# Altium PCB 28Pins_Project_V1I1_PCB.PcbDoc (part 1 of 3)
Units mm, origin at the board's own origin, x right, y up, seen from the top; angles counter-clockwise.
Board outline 68.58 x 53.34 mm, 2 copper layers (L1, L2), stack 1.671 mm thick; 106 components, 71 nets, 323 pads, 106 vias.
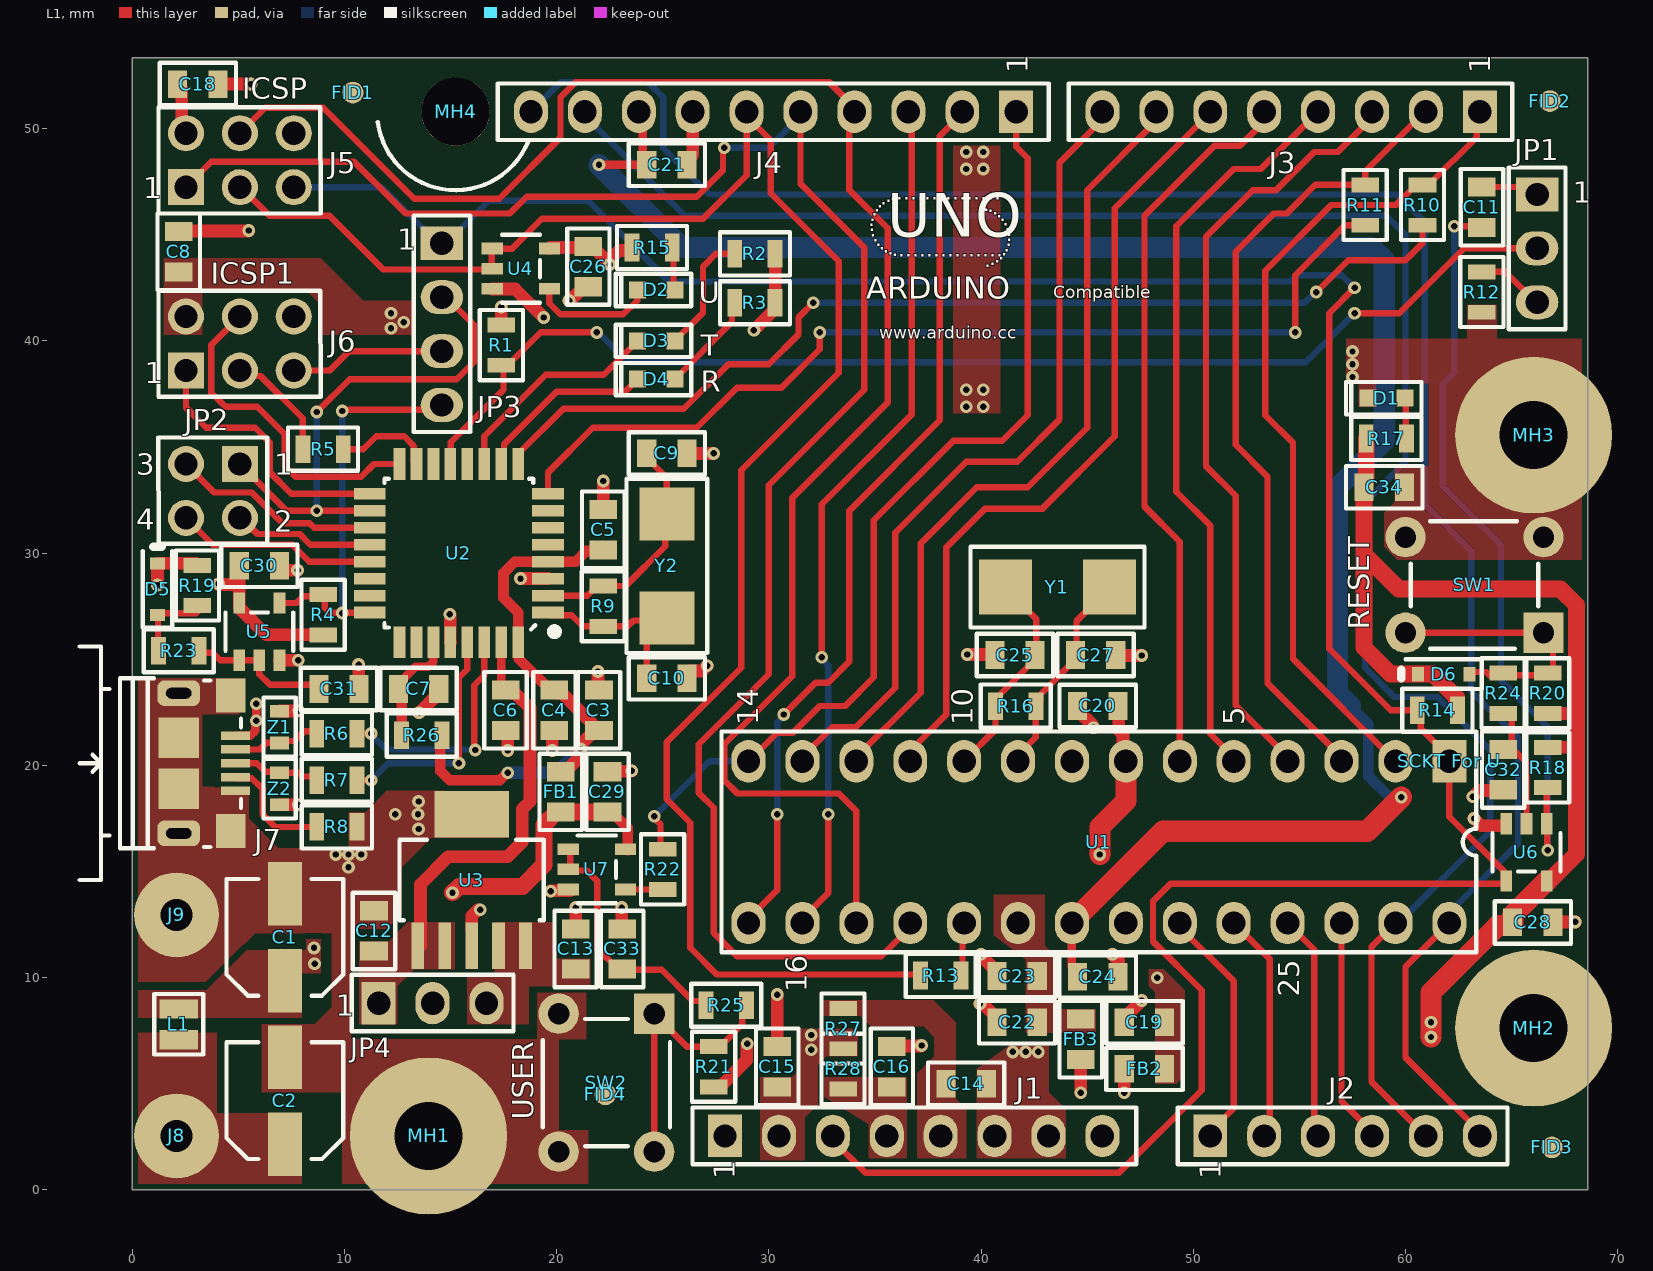
[diagram p0: L1 view]
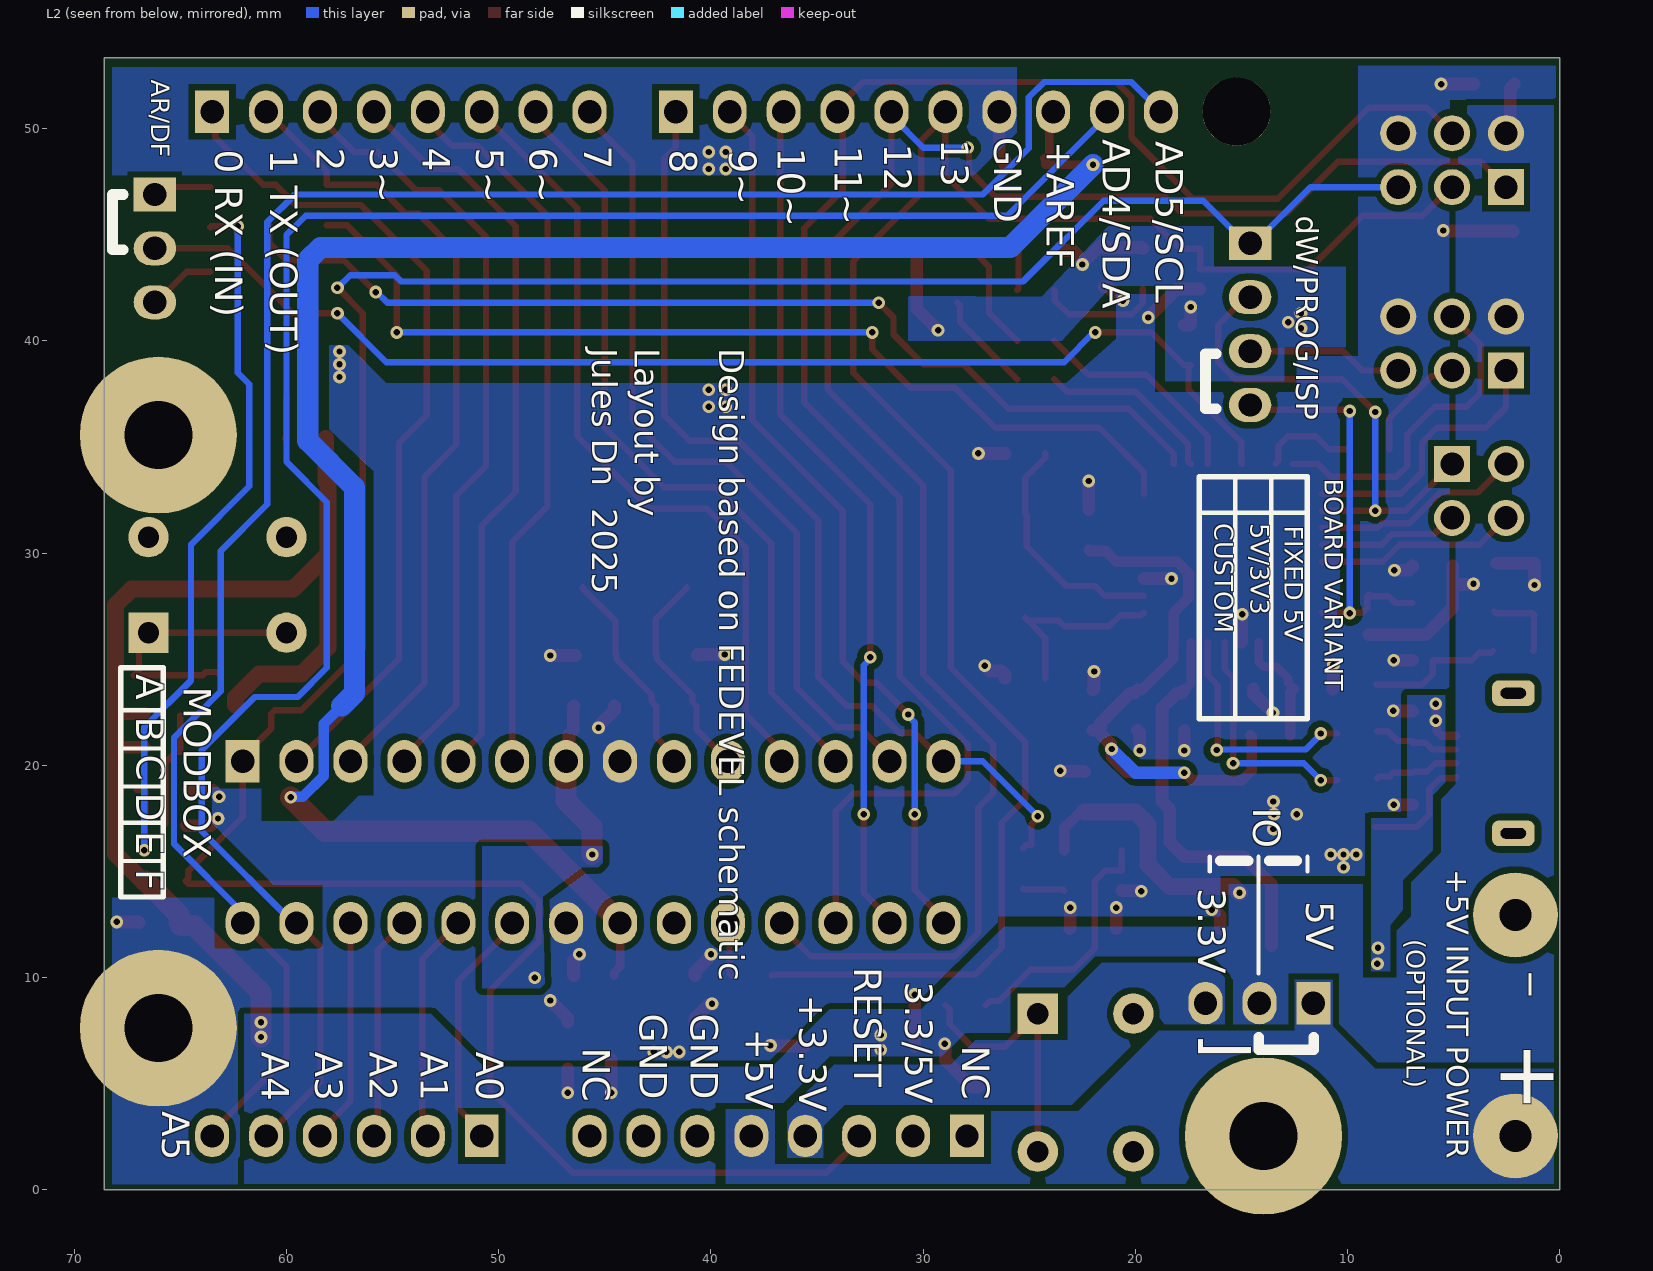
[diagram p1: L2 view, seen from below]

## Layer stack, top to bottom
Top Solder: solder mask 0.0102, Solder Resist, Dk 3.5
L1: signal copper 0.0356
Dielectric 1: dielectric 1.6, FR-4, Dk 4.8
L2: signal copper 0.0356
Bottom Solder: solder mask 0.0102, Solder Resist, Dk 3.5

## Board outline
0,0 68.58,0 68.58,53.34 0,53.34

## Design rules (kind name [scope] priority, off if disabled: settings)
Clearance "Around Polygons" [IsRegion] p1: gap=0.3 ignorepadtopadclearanceinfootprint=FALSE
Clearance [All] p2: gap=0.2 ignorepadtopadclearanceinfootprint=FALSE
ComponentClearance "SW2 and FID4" [InComponent('SW2') vs InComponent('FID4')] p1: gap=0 collisioncheckmode=3 verticalgap=0 showdistances=FALSE
ComponentClearance "Power Resistors" [InComponent('R27') vs InComponent('R28')] p2: gap=0 collisioncheckmode=3 verticalgap=0 showdistances=FALSE
ComponentClearance "MH4 to FID1 and J4" [InComponent('MH4') vs InComponent('FID1')OR InComponent('J4')] p3: gap=0 collisioncheckmode=3 verticalgap=0 showdistances=FALSE
ComponentClearance "DIPSOCKET to MH2 and U1" [InComponent('SCKT For U') vs InComponent('MH2') Or InComponent('U1')] p4: gap=0 collisioncheckmode=3 verticalgap=0 showdistances=FALSE
ComponentClearance "MH2 to J2" [InComponent('MH2') vs InComponent('J2')] p5: gap=0 collisioncheckmode=3 verticalgap=0 showdistances=FALSE
ComponentClearance [All] p6: gap=0.2 collisioncheckmode=3 verticalgap=0.2 showdistances=FALSE
HoleSize [All] p1: absolutevalues=TRUE maxlimit=10 minlimit=0.2 maxpercent=80.000 minpercent=20.000
HoleToHoleClearance [All] p1: gap=0.3 allowstackedmicrovias=TRUE
MinimumSolderMaskSliver [All] p1: minsoldermaskwidth=0.1
PolygonConnect [All] p1: connectstyle=Direct reliefconductorwidth=0.254 reliefentries=4 polygonreliefangle="90 Angle" airgapwidth=0.254
RoutingVias [All] p1: holewidth=0.3 width=0.6 viastyle="Through Hole" minholewidth=0.3 minwidth=0.6 maxholewidth=0.3 maxwidth=0.6
SilkToSilkClearance [All] p1: silktosilkclearance=0.1
SilkToSolderMaskClearance [IsPad] p1: minsilkscreentomaskgap=0.1 clearancetoexposedcopper=TRUE
SolderMaskExpansion [All] p1: expansion=0.1 istentingtop=FALSE
UnRoutedNet [All] p1: checkbadconnections=TRUE
Width "Width POWERS" [InNet('+*') Or InNet('GND')] p1: maxlimit=4 minlimit=0.4 preferedwidth=0.4
Width [All] p2: maxlimit=0.5 minlimit=0.2 preferedwidth=0.3
23 further rules are at their usual default settings.

## Components (designator, comment, footprint, x,y, rotation, side; value= is the part's Value field where it differs from the comment)
C1 "100u / 10V" C_ALU_C_SIZE 7.2,11.9 r90 top value=100uF
C2 "100u / 10V" C_ALU_C_SIZE 7.2,4.2 r90 top value=100uF
C3 "10uF / 16V" "C0805 - 1.45HEIGHT" 22,22.6 r270 top
C4 "100n" C0805 19.9,22.6 r90 top value=100nF
C5 "100n" C0805 22.2,31.1 r270 top value=100nF
C6 "100n" C0805 17.6,22.6 r90 top value=100nF
C7 "1uF / 25V" C0805 13.5,23.6 r180 top
C8 "100n" C0805 2.2,44.2 r270 top value=100nF
C9 "18p" "C0805 - 1.45HEIGHT" 25.2,34.7 r180 top value=18pF
C10 "18p" "C0805 - 1.45HEIGHT" 25.2,24.1 r0 top value=18pF
C11 "100n" C0805 63.6,46.3 r90 top value=100nF
C12 "10uF / 16V" "C0805 - 1.45HEIGHT" 11.4,12.2 r270 top
C13 "10uF / 16V" "C0805 - 1.45HEIGHT" 20.9,11.35 r270 top
C14 "100n" C0805 39.3,5 r180 top value=100nF
C15 "100n" C0805 30.4,5.8 r270 top value=100nF
C16 "100n" C0805 35.8,5.8 r270 top value=100nF
C18 "100n" C0805 3.1,52.1 r180 top value=100nF
C19 "10uF / 16V" "C0805 - 1.45HEIGHT" 47.7,7.9 r0 top
C20 "100n" C0805 45.5,22.8 r0 top value=100nF
C21 "10uF / 16V" "C0805 - 1.45HEIGHT" 25.2,48.3 r180 top
C22 "10uF / 16V" "C0805 - 1.45HEIGHT" 41.7,7.9 r0 top
C23 "100n" C0805 41.7,10.075 r0 top value=100nF
C24 "100n" C0805 45.5,10.05 r180 top value=100nF
C25 "18p" "C0805 - 1.45HEIGHT" 41.6,25.2 r0 top value=18pF
C26 "100n" C0805 21.5,43.5 r90 top value=100nF
C27 "18p" "C0805 - 1.45HEIGHT" 45.4,25.2 r0 top value=18pF
C28 "100n" C0805 66,12.6 r180 top value=100nF
C29 "100n" C0805 22.4,18.75 r270 top value=100nF
C30 "100n" C0805 6,29.4 r180 top value=100nF
C31 "100n" C0805 9.75,23.6 r180 top value=100nF
C32 "100n" C0805 64.6,19.8 r90 top value=100nF
C33 "100n" C0805 23.1,11.35 r270 top value=100nF
C34 "10uF / 16V" "C0805 - 1.45HEIGHT" 59,33.1 r180 top
D1 "Green" LED_0603 59.1,37.3 r0 top
D2 "Orange" LED_0603 24.7,42.4 r0 top
D3 "Orange" LED_0603 24.7,40 r0 top
D4 "Orange" LED_0603 24.7,38.2 r0 top
D5 "BAT54HT1G" SOD323 1.2,28.3 r270 top value=10pF
D6 "BAT54HT1G" SOD323 61.8,24.3 r0 top value=10pF
FB1 "MPZ2012S601AT000" C0805 20.2,18.75 r90 top
FB2 "MPZ2012S601AT000" C0805 47.7,5.7 r0 top
FB3 "MPZ2012S601AT000" C0805 44.7,7.1 r90 top
FID1 "FID_1MMC" FID_40x120D 10.4,51.7 r0 top
FID2 "FID_1MMC" FID_40x120D 66.8,51.3 r90 top
FID3 "FID_1MMC" FID_40x120D 66.9,2 r90 top
FID4 "FID_1MMC" FID_40x120D 22.3,4.5 r90 top
J1 "HDR FEMALE 1x8 2.54mm" Hdr_Female_1x8_2.54mm 27.94,2.54 r90 top locked
J2 "HDR FEMALE 1x6 2.54mm" Hdr_Female_1x6_2.54mm 50.8,2.54 r90 top locked
J3 "HDR FEMALE 1x8 2.54mm" Hdr_Female_1x8_2.54mm 63.5,50.8 r270 top locked
J4 "HDR FEMALE 1x10 2.54mm" Hdr_Female_1x10_2.54mm 41.656,50.8 r270 top locked
J5 "HDR 2x3" HDR_2X3_2.54mm 2.54,47.244 r90 top locked
J6 "HDR 2x3" HDR_2X3_2.54mm 2.54,38.608 r90 top locked
J7 "10118193-0001LF" 10118193 3.537,20.1 r270 top locked
J8 "4MMx1.5MM" PAD_WITH_HOLE_4mmx1.5mm#1 2.1,2.6 r0 top
J9 "4MMx1.5MM" PAD_WITH_HOLE_4mmx1.5mm#2 2.1,12.954 r0 top
JP1 "HDR 1x3" Hdr_1x3_2.54mm 66.2,46.9 r0 top locked
JP2 "HDR 2x2" HDR_2X2_2.54MM 5.08,34.2 r270 top locked
JP3 "HDR 1x4" HDR_1x4_2.54mm 14.6,44.6 r0 top locked
JP4 "HDR 1x3" Hdr_1x3_2.54mm 11.62,8.8 r90 top locked
L1 "2U2 / 2A" 2016_IND 2.2,7.8 r270 top value=2.2uH
MH1 "MH_7.4MMC_3.2MMD" MH_7.4MMD_3.2MMD 13.97,2.54 r0 top locked
MH2 "MH_7.4MMC_3.2MMD" MH_7.4MMD_3.2MMD 66.04,7.62 r0 top locked
MH3 "MH_7.4MMC_3.2MMD" MH_7.4MMD_3.2MMD 66.04,35.56 r0 top locked
MH4 "MH_7.4MMNC_3.2MMD" MH_7.4MMD_3.2MMD_NON_COPPER_NPTH 15.24,50.8 r0 top locked
R1 "100K" R0805 17.4,39.8 r90 top value=100kR
R2 "560R" R0805 29.35,44.1 r0 top
R3 "560R" R0805 29.35,41.8 r0 top
R4 "10k" R0805 9,27.1 r270 top value=10kR
R5 "22R" R0805 9,34.9 r180 top
R6 "22R" R0805 9.65,21.5 r0 top
R7 "22R" R0805 9.65,19.3 r0 top
R8 "0R" R0805 9.65,17.1 r0 top value=0mR
R9 "1M" R0805 22.2,27.5 r90 top value=1MR
R10 "1K" R0805 60.8,46.4 r90 top value=1kR
R11 "1K" R0805 58.1,46.4 r90 top value=1kR
R12 "1K" R0805 63.6,42.3 r90 top value=1kR
R13 "22R" R0805 38.1,10.1 r180 top
R14 "10k" R0805 61.5,22.6 r0 top value=10kR
R15 "560R" R0805 24.5,44.4 r180 top
R16 "1M" R0805 41.634,22.792 r180 top value=1MR
R17 "560R" R0805 59.1,35.4 r180 top
R18 "10k" R0805 66.7,19.9 r90 top value=10kR
R19 "10k" R0805 3.075,28.475 r90 top value=10kR
R20 "10k" R0805 66.7,23.4 r270 top value=10kR
R21 "10k" R0805 27.4,5.8 r270 top value=10kR
R22 "560R" R0805 25,15.1 r90 top
R23 "22R" R0805 2.2,25.4 r0 top
R24 "22R" R0805 64.6,23.4 r270 top
R25 "22R" R0805 28,8.7 r180 top
R26 "0R" R0805 13.65,21.425 r0 top value=0mR
R27 "0R" R0805 33.5,7.6 r270 top value=0mR
R28 "0R" R0805 33.5,5.7 r270 top value=0mR
"SCKT For U" "28-DIP Socket" 28-DIP_7.62MM_SOCKET 62.065,20.193 r270 top locked
SW1 "1825910-6" 1825910-6 63.25,28.5 r270 top
SW2 "1825910-6" 1825910-6 22.35,5.05 r0 top
U1 "ATMEGA328P-PU" 28_DIP_7.62MM 62.065,20.193 r270 top locked
U2 "ATMEGA16U2-AU-ND" TQFP32 15.4,30 r180 top
U3 "TL1963A-33DCQR" "GCQ (R-PDSO-G6)" 16,14.6 r90 top
U4 "SN74AHC1G09DBVR" DBV_SOT_23_5 18.325,43.4 r0 top
U5 "SN74AHC1G09DBVR" DBV_SOT_23_5 6,26.3 r90 top
U6 "SN74AHC1G09DBVR" DBV_SOT_23_5 65.7,15.9 r270 top
U7 "SN74AHC1G09DBVR" DBV_SOT_23_5 21.9,15.1 r0 top
Y1 "ABM7-16.000MHZ-D2Y-T" ABM7_v1_1_big 43.6,28.4 r180 top
Y2 "ABM7-16.000MHZ-D2Y-T" ABM7_v1_1_big 25.2,29.4 r90 top
Z1 "CG0603MLC-05E" R0603 6.95,21.8 r270 top value=0.5pF
Z2 "CG0603MLC-05E" R0603 6.95,18.9 r90 top value=0.5pF

## Footprints (in the part's own frame and the unit in brackets; to place one, negate y for a bottom-side part, rotate by r counter-clockwise, add the part's x,y. Pads: shape width x height; smd on the part's side, far side on the other; paste and mask are expansions set on the pad)
28-DIP_7.62MM_SOCKET [mm]
  body extent -1.24,-34.26 8.86,1.24, height 4.2
28_DIP_7.62MM [mm]
  rect 2x1.6 hole 1.1: 1(0,0)
  oval 2x1.6 hole 1.1: 2(0,-2.54) 3(0,-5.08) 4(0,-7.62) 5(0,-10.16) 6(0,-12.7) 7(0,-15.24) 8(0,-17.78) 9(0,-20.32) 10(0,-22.86) 11(0,-25.4) 12(0,-27.94) 13(0,-30.48) 14(0,-33.02) 15(7.62,-33.02) 16(7.62,-30.48) 17(7.62,-27.94) 18(7.62,-25.4) 19(7.62,-22.86) 20(7.62,-20.32) 21(7.62,-17.78) 22(7.62,-15.24) 23(7.62,-12.7) 24(7.62,-10.16) 25(7.62,-7.62) 26(7.62,-5.08) 27(7.62,-2.54) 28(7.62,0)
  silkscreen extent -1.4,-34.29 9,1.27, body extent -0.03,-34.51 7.85,1.43, height 7.55
2016_IND [mm]
  rect 0.9x1.8 smd: 1(-0.725,0) 2(0.725,0)
  silkscreen extent -1.43,-1.15 1.43,1.15, body extent -1,-0.75 1,0.75, height 1
1825910-6 [mm]
  rect 1.9x1.9 hole 1: 1(2.25,3.25)
  round 1.9 hole 1: 2(2.25,-3.25) 3(-2.25,3.25) 4(-2.25,-3.25)
  silkscreen extent -3,-3 3,3, body extent -3,-3.9 3,3.9, height 5
10118193 [mm]
  rect 0.4x1.35 smd mask+0.05: 1(-1.3,1.338) 2(-0.65,1.338) 3(0,1.338) 4(0.65,1.338) 5(1.3,1.338)
  rect 1.6x1.4 smd: 6(-3.2,1.112) 7(3.2,1.112)
  rrect50% 1.2x2 hole 0.5 slot 1.2 at 90 deg: 8(-3.3,-1.338) 9(3.3,-1.338)
  rect 1.9x1.9 smd: 10(-1.2,-1.338) 11(1.2,-1.338)
  silkscreen extent -5.5,-6 5.5,1.6, body extent -3.93,-4.07 3.93,1.59, height 2.87
ABM7_v1_1_big [mm]
  rect 2.5x2.6 smd: 1(-2.45,0) 2(2.45,0)
  silkscreen extent -4.1,-1.9 4.1,1.9, body extent -3,-1.75 3,1.75, height 1.41
C0805 [mm]
  rect 0.9x1.3 smd: 1(-0.95,0) 2(0.95,0)
  silkscreen extent -1.8,-1 1.8,1, body extent -1,-0.6 1,0.6
"C0805 - 1.45HEIGHT" [mm]
  rect 0.9x1.3 smd: 1(-0.95,0) 2(0.95,0)
  silkscreen extent -1.8,-1 1.8,1, body extent -1,-0.6 1,0.6
C_ALU_C_SIZE [mm]
  rect 3x1.6 smd: 1(-2.05,0) 2(2.05,0)
  silkscreen extent -2.75,-2.75 2.75,2.75, body extent -2.95,-2.65 2.95,2.65, height 5.41
DBV_SOT_23_5 [mm]
  rect 1x0.55 smd: 1(-1.35,0.95) 2(-1.35,0) 3(-1.35,-0.95) 4(1.35,-0.95) 5(1.35,0.95)
  silkscreen extent -0.9,-1.6 0.9,1.6, body extent -1.51,-1.53 1.51,1.53, height 1.61
FID_40x120D [mil]
  round 40 smd paste-40 mask+40: 1(0,0)
"GCQ (R-PDSO-G6)" [mm]
  rect 2.2x0.6 smd: 1(-3.1,2.54) 2(-3.1,1.27) 3(-3.1,0) 4(-3.1,-1.27) 5(-3.1,-2.54)
  rect 2.2x3.5 smd: 6(3.1,0)
  silkscreen extent -1.9,-3.4 1.9,3.4, body extent -3.63,-3.27 3.63,3.27, height 1.79
Hdr_1x3_2.54mm [mm]
  rect 2x1.6 hole 1.1: 1(0,0)
  oval 2x1.6 hole 1.1: 2(0,-2.54) 3(0,-5.08)
  silkscreen extent -1.33,-6.35 1.34,1.27, body extent -1.21,-6.15 1.2,1.07, height 8.39
HDR_1x4_2.54mm [mm]
  rect 2x1.6 hole 1.1: 1(0,0)
  oval 2x1.6 hole 1.1: 2(0,-2.54) 3(0,-5.08) 4(0,-7.62)
  silkscreen extent -1.33,-8.89 1.34,1.3, body extent -1.21,-8.69 1.2,1.07, height 8.39
HDR_2X2_2.54MM [mm]
  rect 1.7x1.7 hole 1.1: 1(0,0)
  round 1.7 hole 1.1: 2(2.54,0) 3(0,-2.54) 4(2.54,-2.54)
  silkscreen extent -1.24,-3.84 3.76,1.3, body extent -1.24,-3.81 3.76,1.27, height 8.01
HDR_2X3_2.54mm [mm]
  rect 1.7x1.7 hole 1.1: 1(0,0)
  round 1.7 hole 1.1: 2(2.54,0) 3(0,-2.54) 4(2.54,-2.54) 5(0,-5.08) 6(2.54,-5.08)
  silkscreen extent -1.24,-6.35 3.76,1.3, body extent -1.23,-6.35 3.77,1.27, height 8.01
Hdr_Female_1x6_2.54mm [mm]
  rect 2x1.6 hole 1.1: 1(0,0)
  oval 2x1.6 hole 1.1: 2(0,-2.54) 3(0,-5.08) 4(0,-7.62) 5(0,-10.16) 6(0,-12.7)
  silkscreen extent -1.33,-14 1.34,1.53, body extent -1.25,-14.17 1.25,1.47, height 8.31
Hdr_Female_1x8_2.54mm [mm]
  rect 2x1.6 hole 1.1: 1(0,0)
  oval 2x1.6 hole 1.1: 2(0,-2.54) 3(0,-5.08) 4(0,-7.62) 5(0,-10.16) 6(0,-12.7) 7(0,-15.24) 8(0,-17.78)
  silkscreen extent -1.33,-19.37 1.34,1.53, body extent -1.26,-19.28 1.24,1.44, height 8.31
Hdr_Female_1x10_2.54mm [mm]
  rect 2x1.6 hole 1.1: 1(0,0)
  oval 2x1.6 hole 1.1: 2(0,-2.54) 3(0,-5.08) 4(0,-7.62) 5(0,-10.16) 6(0,-12.7) 7(0,-15.24) 8(0,-17.78) 9(0,-20.32) 10(0,-22.86)
  silkscreen extent -1.33,-24.43 1.34,1.53, body extent -1.25,-24.33 1.25,1.47, height 8.31
LED_0603 [mm]
  rect 0.8x0.8 smd: 1(-0.875,0) 2(0.875,0)
  silkscreen extent -1.91,-0.76 1.65,0.76, body extent -0.85,-0.4 0.85,0.4, height 0.66
MH_7.4MMD_3.2MMD [mm]
  round 7.4 hole 3.2: 1(0,0)
MH_7.4MMD_3.2MMD_NON_COPPER_NPTH [mm]
  round 3.2 hole 3.2 unplated: 1(0,0)
  silkscreen extent -3.67,-3.7 3.43,-0.49
PAD_WITH_HOLE_4mmx1.5mm#1 [mm]
  round 4 hole 1.5: 1(0,-0.06)
PAD_WITH_HOLE_4mmx1.5mm#2 [mm]
  round 4 hole 1.5: 1(0,0)
R0603 [mm]
  rect 0.6x0.9 smd: 1(-0.75,0) 2(0.75,0)
  silkscreen extent -1.4,-0.76 1.4,0.76, body extent -0.8,-0.4 0.8,0.4, height 0.85
R0805 [mm]
  rect 0.7x1.3 smd: 1(-0.95,0) 2(0.95,0)
  silkscreen extent -1.65,-1.02 1.65,1.02, body extent -1,-0.6 1,0.6, height 0.71
SOD323 [mil]
  rect 22x27 smd: 1(-48,0) 2(48,0)
  silkscreen extent -79,-28 71,28, body extent -49,-25 49,25, height 39
TQFP32 [mm]
  rect 1.5x0.55 smd mask+0.06: 1(-4.2,2.8) 2(-4.2,2) 3(-4.2,1.2) 4(-4.2,0.4) 5(-4.2,-0.4) 6(-4.2,-1.2) 7(-4.2,-2) 8(-4.2,-2.8) 17(4.2,-2.8) 18(4.2,-2) 19(4.2,-1.2) 20(4.2,-0.4) 21(4.2,0.4) 22(4.2,1.2) 23(4.2,2) 24(4.2,2.8)
  rect 0.55x1.5 smd mask+0.06: 9(-2.8,-4.2) 10(-2,-4.2) 11(-1.2,-4.2) 12(-0.4,-4.2) 13(0.4,-4.2) 14(1.2,-4.2) 15(2,-4.2) 16(2.8,-4.2) 25(2.8,4.2) 26(2,4.2) 27(1.2,4.2) 28(0.4,4.2) 29(-0.4,4.2) 30(-1.2,4.2) 31(-2,4.2) 32(-2.8,4.2)
  silkscreen extent -4.6,-3.5 3.5,3.8, body extent -4.62,-4.62 4.62,4.62, height 1.2

## Part data
C1 C2: library part EEE-1AA101WR, "Aluminum Electrolytic Capacitor, 100 uF, 10 V, ± 20%, 1000 hours @ 85°C, Radial Can - SMD", Case/Package=Radial, Leakage Current=10uA, Manufacturer=Panasonic, Max Operating Temperature=85°C, Min Operating Temperature=-40°C, Package Quantity=1000, Ratings=AEC-Q200, Ripple Current=50mA, Supplier Part Number=PCE3867CT-ND, Tolerance=20%, Voltage Rating=10V, Category="Aluminum Electrolytic Capacitors", ComponentLink1Description=https://datasheet.ciiva.com/26945/getdatasheetpartid-169213-26945071.pdf?src-supplier=Verical, ComponentLink1URL=https://datasheet.ciiva.com/26945/getdatasheetpartid-169213-26945071.pdf?src-supplier=Verical, ComponentLink2Description=https://datasheet.ciiva.com/24027/aba0000ce2-40801-24027541.pdf?src-supplier=Mouser, ComponentLink2URL=https://datasheet.ciiva.com/24027/aba0000ce2-40801-24027541.pdf?src-supplier=Mouser, ComponentLink3Description=https://datasheet.ciiva.com/14598/70255710-14598233.pdf?src-supplier=Allied+Electronics, ComponentLink3URL=https://datasheet.ciiva.com/14598/70255710-14598233.pdf?src-supplier=Allied+Electronics, ComponentLink4Description=https://datasheet.ciiva.com/14605/70255710-14605689.pdf?src-supplier=Allied+Electronics, ComponentLink4URL=https://datasheet.ciiva.com/14605/70255710-14605689.pdf?src-supplier=Allied+Electronics, ComponentLink5Description=https://datasheet.ciiva.com/11673/aba0000ce2-11673882.pdf?src-supplier=Avnet, ComponentLink5URL=https://datasheet.ciiva.com/11673/aba0000ce2-11673882.pdf?src-supplier=Avnet, ComponentLink6Description=https://datasheet.ciiva.com/16427/aba0000ce2-16427544.pdf?src-supplier=Future+Electronics, ComponentLink6URL=https://datasheet.ciiva.com/16427/aba0000ce2-16427544.pdf?src-supplier=Future+Electronics, Construction=Cylindrical, Diameter=5mm, Dissipation Factor=30%, Height=5.4mm, Lead Free="Lead Free", Length=5.5mm, Life (Hours)=1000Hour, Manufacturer Part Number=EEE-1AA101WR, Mounting Technology="Surface Mount,PCB", Packaging="Tape and Reel", Pricing="1=0.36, 10=0.22, 50=0.1606, 100=0.1419, 500=0.10952 (USD)", Radiation Hardening=No, Reach SVHC Compliant=Unknown, Ripple Current (AC)=50mA, RoHS=Yes, RoHS Compliant=Yes, Series=S, Stock=38374, Supplier=Digikey, Termination=SMD/SMT, Voltage Rating (DC)=10V
C3 C12 C13 C19 C21 C22 C34: library part CGA4J1X5R1C106M125AC, "Multilayer Ceramic Capacitor, 10 uF, 16 V, ± 20%, X5R, 0805 [2012 Metric]", Manufacturer=TDK, Supplier Part Number=445-12654-1-ND, Category="Ceramic Capacitors", ComponentLink1Description=http://product.tdk.com/en/catalog/datasheets/mlcc_automotive_general_en.pdf?src-supplier=Avnet, ComponentLink1URL=http://product.tdk.com/en/catalog/datasheets/mlcc_automotive_general_en.pdf?src-supplier=Avnet, ComponentLink2Description=http://product.tdk.com/capacitor/mlcc/detailed_information.php?lang=en&ref=jp&part_no=CGA4J1X5R1C106M125AC&src-supplier=Mouser, ComponentLink2URL=http://product.tdk.com/capacitor/mlcc/detailed_information.php?lang=en&ref=jp&part_no=CGA4J1X5R1C106M125AC&src-supplier=Mouser, ComponentLink3Description=https://product.tdk.com/info/en/catalog/datasheets/mlcc_automotive_general_en.pdf?src-supplier=Digikey, ComponentLink3URL=https://product.tdk.com/info/en/catalog/datasheets/mlcc_automotive_general_en.pdf?src-supplier=Digikey, ComponentLink4Description=https://product.tdk.com/info/en/documents/chara_sheet/CGA4J1X5R1C106M125AC.pdf?src-supplier=Digikey, ComponentLink4URL=https://product.tdk.com/info/en/documents/chara_sheet/CGA4J1X5R1C106M125AC.pdf?src-supplier=Digikey, Lead Free=5697LeadFree, Manufacturer Part Number=CGA4J1X5R1C106M125AC, Material=4241ConductorMaterial, Pricing="1=0.41, 10=0.249, 100=0.1647, 1000=0.12091 (USD)", RoHS=Yes, Stock=406288, Supplier=Digikey
C4 C5 C6 C8 C11 C14 C15 C16 C18 C20 C23 C24 C26 C28 C29 C30 C31 C32 C33: library part C2012X7R1H104K085AA, "Multilayer Ceramic Capacitor, 0.1 uF, 50 V, ± 10%, X7R, 0805 [2012 Metric]", Case Code (Imperial)=0805, Case Code (Metric)=2012, Dielectric=X7R, Manufacturer=TDK, Max Operating Temperature=125°C, Min Operating Temperature=-55°C, Package Quantity=1, Supplier Part Number=445-7534-1-ND, Tolerance=10%, Voltage=50V, Case/Package=0805, Category="Ceramic Capacitors", ComponentLink1Description=https://datasheet.ciiva.com/11788/0900766b80c1bb00-11788128.pdf?src-supplier=Rs, ComponentLink1URL=https://datasheet.ciiva.com/11788/0900766b80c1bb00-11788128.pdf?src-supplier=Rs, ComponentLink2Description=https://datasheet.ciiva.com/6250/tdkmlcccaprange-6250821.pdf?src-supplier=Digikey, ComponentLink2URL=https://datasheet.ciiva.com/6250/tdkmlcccaprange-6250821.pdf?src-supplier=Digikey, ComponentLink3Description=https://datasheet.ciiva.com/6250/tdkmlcccaprange-6250824.pdf?src-supplier=Digikey, ComponentLink3URL=https://datasheet.ciiva.com/6250/tdkmlcccaprange-6250824.pdf?src-supplier=Digikey, ComponentLink4Description=https://datasheet.ciiva.com/23803/1796654-23803035.pdf?src-supplier=Newark, ComponentLink4URL=https://datasheet.ciiva.com/23803/1796654-23803035.pdf?src-supplier=Newark, ComponentLink5Description=https://datasheet.ciiva.com/28602/1571323-28602204.pdf?src-supplier=Element14, ComponentLink5URL=https://datasheet.ciiva.com/28602/1571323-28602204.pdf?src-supplier=Element14, ComponentLink6Description=https://datasheet.ciiva.com/24191/e412-c-24191447.pdf?src-supplier=Future+Electronics, ComponentLink6URL=https://datasheet.ciiva.com/24191/e412-c-24191447.pdf?src-supplier=Future+Electronics, Depth=1.25mm, Height=0.85mm, Lead Free="Lead Free", Length=2mm, Manufacturer Part Number=C2012X7R1H104K085AA, Mounting Technology="Surface Mount", Packaging="Tape and Reel", Pins=2, Pricing="1=0.13, 10=0.071, 50=0.0492, 100=0.0424, 500=0.03106, 1000=0.02754 (USD)", Reach SVHC Compliant=No, RoHS=Yes, RoHS Compliant=Yes, Series=C, Stock=1425374, Supplier=Digikey, Termination=SMD/SMT, Thickness=0.037inch, Voltage Rating=50V, Width=0.049inch
C7: library part C2012X5R1E105K125AA, "CAP CER 1UF 25V X5R 0805", Manufacturer=TDK, Supplier Part Number=445-1419-1-ND, Category="Ceramic Capacitors", ComponentLink1Description=https://datasheet.ciiva.com/11787/0900766b80c1bb00-11787608.pdf?src-supplier=Rs, ComponentLink1URL=https://datasheet.ciiva.com/11787/0900766b80c1bb00-11787608.pdf?src-supplier=Rs, ComponentLink2Description=https://datasheet.ciiva.com/16449/e412-c-16449595.pdf?src-supplier=Future+Electronics, ComponentLink2URL=https://datasheet.ciiva.com/16449/e412-c-16449595.pdf?src-supplier=Future+Electronics, ComponentLink3Description=https://datasheet.ciiva.com/15192/getdatasheetpartid-726707-15192140.pdf?src-supplier=Verical, ComponentLink3URL=https://datasheet.ciiva.com/15192/getdatasheetpartid-726707-15192140.pdf?src-supplier=Verical, ComponentLink4Description=https://datasheet.ciiva.com/28602/1744655-28602171.pdf?src-supplier=Element14, ComponentLink4URL=https://datasheet.ciiva.com/28602/1744655-28602171.pdf?src-supplier=Element14, Manufacturer Part Number=C2012X5R1E105K125AA, Pricing="1=0.19, 10=0.106, 100=0.0662, 1000=0.04546 (USD)", RoHS=Yes, Stock=44032, Supplier=Digikey
C9 C10 C25 C27: library part C0805C180J5GACTU, "SMD Comm C0G 0805 (2012Metric) Ceramic Capacitor 0.079Lx0.049W 2.00mmx1.25mm C0G NP0 ±5% 18pF", Case Code (Imperial)=0805, Case Code (Metric)=2012, Dielectric=C0G, Manufacturer=KEMET, Max Operating Temperature=125°C, Min Operating Temperature=-55°C, Package Quantity=1, Supplier Part Number=399-C0805C180J5GACTUCT-ND, Tolerance=5%, Voltage=50V, Case/Package=0805, Category="Ceramic Capacitors", ComponentLink1Description=https://datasheet.ciiva.com/26923/getdatasheetpartid-759702-26923980.pdf?src-supplier=Verical, ComponentLink1URL=https://datasheet.ciiva.com/26923/getdatasheetpartid-759702-26923980.pdf?src-supplier=Verical, Construction=Flat, Depth=1.25mm, Dissipation Factor=0.1%, Height=0.78mm, Lead Free=5697LeadFree, Lead Pitch=0.75mm, Length=2mm, Manufacturer Part Number=C0805C180J5GACTU, Material=4241ConductorMaterial, Mounting Technology="Surface Mount,PCB", Packaging="Tape and Reel", Pins=2, Pricing="1=0.11, 10=0.06, 100=0.0358, 1000=0.0235 (USD)", Radiation Hardening=No, Reach SVHC Compliant=No, RoHS=Yes, RoHS Compliant=Yes, Series=C, Stock=46876, Supplier=Digikey, Termination=SMD/SMT, Thickness=0.035inch, Voltage Rating=50V, Voltage Rating (AC)=50V, Voltage Rating (DC)=50V, Width=0.049inch
D1: library part APT1608LZGCK, "Green 525nm LED Indication - Discrete 2.65V 0603 (1608 Metric)", Case Code (Imperial)=0603, Case Code (Metric)=1608, Forward Current=2mA, Forward Voltage=2.65V, Lens Color=Colorless, Manufacturer=Kingbright, Max Operating Temperature=85°C, Min Operating Temperature=-40°C, Power Dissipation=102.5mW, Reverse Voltage=5V, Supplier Part Number=754-1934-1-ND, Case/Package=0603, Category=LEDs, Color=Green, ComponentLink1Description=http://www.mouser.com/ds/2/216/APT1608LZGCK-535830.pdf?src-supplier=Mouser, ComponentLink1URL=http://www.mouser.com/ds/2/216/APT1608LZGCK-535830.pdf?src-supplier=Mouser, ComponentLink2Description=http://www.kingbrightusa.com/images/catalog/SPEC/APT1608LZGCK.pdf?src-supplier=Digikey, ComponentLink2URL=http://www.kingbrightusa.com/images/catalog/SPEC/APT1608LZGCK.pdf?src-supplier=Digikey, Dominant Wavelength=525nm, Height=0.75mm, Length=1.6mm, Lens Transparency=Clear, Luminous Intensity=50mcd, Manufacturer Part Number=APT1608LZGCK, Mounting Technology="Surface Mount", Packaging="Cut Tape", Pricing="1=0.56, 10=0.385, 100=0.2776, 500=0.2292, 1000=0.2133 (USD)", RoHS=Yes, RoHS Compliant=Yes, Series=HELI2, Stock=138849, Supplier=Digikey, Test Current=2mA, Viewing Angle=120°, Wavelength=525nm, Width=0.8mm
D2 D3 D4: library part CSL1901DW1, "LED Uni-Color Orange 2-Pin Chip 0603(1608Metric) T/R", Manufacturer=Rohm, Supplier Part Number=846-CSL1901DW1CT-ND, Category=LEDs, Manufacturer Part Number=CSL1901DW1, Pricing="1=0.41, 10=0.278, 100=0.1982, 500=0.16192, 1000=0.14996 (USD)", RoHS=No, Stock=3254, Supplier=Digikey
D5 D6: "Small Signal Schottky Diode, Single, 30 V, 200 Ma, 800 Mv, 600 Ma, 150 C", Average Rectified Current=200mA, Breakdown Voltage=30V, Forward Voltage=800mV, Manufacturer="ON Semiconductor / Fairchild", Max Forward Surge Current (Ifsm)=600mA, Max Operating Temperature=150°C, Max Reverse Current=2uA, Min Operating Temperature=-55°C, Package Quantity=1, Power Dissipation=200mW, Supplier Part Number=BAT54HT1GOSCT-ND, Category="Schottky Diodes", ComponentLink1Description=https://datasheet.ciiva.com/4452/bat54ht1g-104602-4452889.pdf?src-supplier=Mouser, ComponentLink1URL=https://datasheet.ciiva.com/4452/bat54ht1g-104602-4452889.pdf?src-supplier=Mouser, ComponentLink2Description=https://datasheet.ciiva.com/30479/0900766b811a63a9-30479442.pdf?src-supplier=Rs, ComponentLink2URL=https://datasheet.ciiva.com/30479/0900766b811a63a9-30479442.pdf?src-supplier=Rs, ComponentLink3Description=https://datasheet.ciiva.com/34301/806549-34301562.pdf?src-supplier=Jameco, ComponentLink3URL=https://datasheet.ciiva.com/34301/806549-34301562.pdf?src-supplier=Jameco, ComponentLink4Description=https://datasheet.ciiva.com/1240/1747983-1240762.pdf?src-supplier=Newark, ComponentLink4URL=https://datasheet.ciiva.com/1240/1747983-1240762.pdf?src-supplier=Newark, ComponentLink5Description=https://datasheet.ciiva.com/4714/bat54ht1-d-72881-4714706.pdf?src-supplier=Mouser, ComponentLink5URL=https://datasheet.ciiva.com/4714/bat54ht1-d-72881-4714706.pdf?src-supplier=Mouser, ComponentLink6Description=https://datasheet.ciiva.com/1180/bat54ht1-d-1180251.pdf?src-supplier=Element14, ComponentLink6URL=https://datasheet.ciiva.com/1180/bat54ht1-d-1180251.pdf?src-supplier=Element14, ComponentLink7Description=https://datasheet.ciiva.com/1180/bat54ht1-d-1180252.pdf?src-supplier=Element14, ComponentLink7URL=https://datasheet.ciiva.com/1180/bat54ht1-d-1180252.pdf?src-supplier=Element14, ComponentLink8Description=https://datasheet.ciiva.com/46429/1727620-46429206.pdf?src-supplier=Element14, ComponentLink8URL=https://datasheet.ciiva.com/46429/1727620-46429206.pdf?src-supplier=Element14, ComponentLink9Description=https://datasheet.ciiva.com/48686/001262925-da-01-en-diode-schottky-30v-bat54ht1g-sod-323-fsc-48686266.pdf?src-supplier=Conrad, ComponentLink9URL=https://datasheet.ciiva.com/48686/001262925-da-01-en-diode-schottky-30v-bat54ht1g-sod-323-fsc-48686266.pdf?src-supplier=Conrad, Contact Plating=Tin,Matte, Current Rating=200mA, Forward Current=200mA, Height=1mm, Lead Free="Lead Free", Length=1.8mm, Manufacturer Part Number=BAT54HT1G, Max Repetitive Reverse Voltage (Vrrm)=30V, Max Reverse Leakage Current=2uA, Max Reverse Voltage (DC)=30V, Max Surge Current=600mA, Mounting Technology="Surface Mount", Output Current=200mA, Packaging="Tape and Reel", Peak Non-Repetitive Surge Current=600mA, Pins=2, Polarity=4901Direction, Pricing="1=0.12, 10=0.072, 100=0.0554, 500=0.04014, 1000=0.03517 (USD)", Radiation Hardening=No, Reach SVHC Compliant=No, Recovery Time=5ns, Reverse Recovery Time=5ns, Reverse Recovery Time-Max=5ns, Reverse Voltage=30V, RoHS=Yes, RoHS Compliant=Yes, Series=-, Stock=15, Supplier=Digikey, Voltage Rating (DC)=30V, Width=1.35mm
FB1 FB2 FB3: "Ferrite Beads Multi-Layer Power 600Ohm 25% 100MHz 2A 100mOhm DCR 0805 T/R", Case Code (Imperial)=0805, Case Code (Metric)=2012, Current Rating=2A, DC Resistance (DCR)=100mR, Manufacturer=TDK, Max Operating Temperature=125°C, Min Operating Temperature=-55°C, Package Quantity=1, Supplier Part Number=445-MPZ2012S601AT000CT-ND, Test Frequency=100MHz, Tolerance=25%, Case/Package=0805, Category="Ferrite Beads and Chips", ComponentLink1Description=https://datasheet.ciiva.com/46634/beads-commercial-power-mpz-en-46634335.pdf?src-supplier=Digikey, ComponentLink1URL=https://datasheet.ciiva.com/46634/beads-commercial-power-mpz-en-46634335.pdf?src-supplier=Digikey, ComponentLink2Description=https://datasheet.ciiva.com/46634/beads-commercial-power-mpz-en-46634377.pdf?src-supplier=Digikey, ComponentLink2URL=https://datasheet.ciiva.com/46634/beads-commercial-power-mpz-en-46634377.pdf?src-supplier=Digikey, ComponentLink3Description=https://datasheet.ciiva.com/46634/beads-commercial-power-mpz-en-46634606.pdf?src-supplier=Digikey, ComponentLink3URL=https://datasheet.ciiva.com/46634/beads-commercial-power-mpz-en-46634606.pdf?src-supplier=Digikey, Core Material=228ConductorMaterial, ESR=100mR, Height=0.041inch, Impedance=600R, Lead Free="Lead Free", Length=0.079inch, Manufacturer Part Number=MPZ2012S601AT000, Max Current Rating=2A, Max DC Current=2A, Mounting Technology="Surface Mount", Number of Lines=1, Packaging="Tape and Reel", Pricing="1=0.11, 10=0.076, 25=0.0664, 50=0.0594, 100=0.0533, 250=0.04584, 500=0.04074, 1000=0.03601 (USD)", Reach SVHC Compliant=No, RMS Current (Irms)=2A, RoHS=Yes, RoHS Compliant=Yes, Series=MPZ, Stock=67973, Supplier=Digikey, Width=0.049inch
FID1 FID2 FID3 FID4: "Fiducial 40mil Diameter, 120mil Mask"
J1 J3: library part M20-7820842, "2.54mm (0.1\") Pitch SIL Vertical PC Tail Socket Assembly, selective gold + tin, 8 contacts", Case/Package=SIL, Flammability Rating="UL94 V-0", Insulation Color=Black, Manufacturer=Harwin, Max Operating Temperature=105°C, Min Operating Temperature=-40°C, Supplier Part Number=952-1823-ND, Voltage Rating=1kV, Category="Headers and Wire Housings", ComponentLink1Description=https://datasheet.ciiva.com/9480/m20-782-9480074.pdf?src-supplier=Avnet, ComponentLink1URL=https://datasheet.ciiva.com/9480/m20-782-9480074.pdf?src-supplier=Avnet, Connector Type=Receptacle, Contact Finish - Mating=GOLD, Contact Gender=Female, Contact Material=Bronze, Contact Plating=Tin,Gold, Contact Shape=Square, Contact Type="Female Socket", Fastening Type=Pull, Gender=Female, Insulation Material=Nylon, Manufacturer Part Number=M20-7820842, Mated Stacking Heights=12.63mm, Mounting Technology="Through Hole", Number of Contacts=8, Number of Positions=8, Number of Rows=1, Packaging=Rail/Tube, Pitch=2.54mm, Pricing="1=1.44, 27=1.16556, 108=1.09102, 513=0.89263, 1026=0.79346, 5022=0.69427, 10017=0.65956 (USD)", Radiation Hardening=No, RoHS=Yes, RoHS Compliant=Yes, Series=M20, Stock=2660, Supplier=Digikey, Termination=Solder, Weight=0.025397oz
J2: library part M20-7820646, "2.54mm (0.1\") Pitch SIL Vertical PC Tail Socket Assembly, tin, 6 contacts", Case/Package=SIL, Flammability Rating="UL94 V-0", Insulation Color=Black, Manufacturer=Harwin, Max Operating Temperature=105°C, Min Operating Temperature=-40°C, Package Quantity=38, Supplier Part Number=952-1809-ND, Voltage Rating=1kV, Category="Headers and Wire Housings", ComponentLink1Description=https://cdn.harwin.com/pdfs/Harwin_PC_Connectors_M20.pdf?src-supplier=Rs, ComponentLink1URL=https://cdn.harwin.com/pdfs/Harwin_PC_Connectors_M20.pdf?src-supplier=Rs, ComponentLink2Description=http://www.harwin.com/include/downloads/pdfs/2010PAGE120.PDF?src-supplier=Avnet, ComponentLink2URL=http://www.harwin.com/include/downloads/pdfs/2010PAGE120.PDF?src-supplier=Avnet, ComponentLink3Description=https://cdn.harwin.com/pdfs/M20-782.pdf?src-supplier=Digikey, ComponentLink3URL=https://cdn.harwin.com/pdfs/M20-782.pdf?src-supplier=Digikey, ComponentLink4Description=https://cdn.harwin.com/pdfs/Harwin_PC_Connectors_M20.pdf?src-supplier=Mouser, ComponentLink4URL=https://cdn.harwin.com/pdfs/Harwin_PC_Connectors_M20.pdf?src-supplier=Mouser, ComponentLink5Description=https://cdn.harwin.com/pdfs/Harwin_PC_Connectors_M20.pdf?src-supplier=TTI, ComponentLink5URL=https://cdn.harwin.com/pdfs/Harwin_PC_Connectors_M20.pdf?src-supplier=TTI, Connector Type=Receptacle, Contact Finish - Mating=TIN, Contact Gender=Female, Contact Material=Bronze, Contact Plating=Tin, Contact Shape=Square, Contact Type="Female Socket", Fastening Type=Pull, Insulation Material=Nylon, Manufacturer Part Number=M20-7820646, Mated Stacking Heights=12.63mm, Mounting Technology="Through Hole", Number of Contacts=6, Number of Positions=6, Number of Rows=1, Packaging=Rail/Tube, Pitch=2.54mm, Pricing="1=1.24, 36=1.00861, 108=0.94435, 504=0.77266, 1008=0.6868, 5004=0.60095, 10008=0.5709 (USD)", Radiation Hardening=No, RoHS=Yes, RoHS Compliant=Yes, Series=M20, Stock=986, Supplier=Digikey, Termination=Solder
J4: library part M20-7821046, "2.54mm (0.1\") Pitch SIL Vertical PC Tail Socket Assembly, tin, 10 contacts", Manufacturer=Harwin, Supplier Part Number=952-1847-ND, Category="Headers and Wire Housings", ComponentLink1Description=https://datasheet.ciiva.com/11753/0900766b80dc1d2b-11753869.pdf?src-supplier=Rs, ComponentLink1URL=https://datasheet.ciiva.com/11753/0900766b80dc1d2b-11753869.pdf?src-supplier=Rs, ComponentLink2Description=https://datasheet.ciiva.com/26899/getdatasheetpartid-559226-26899379.pdf?src-supplier=Verical, ComponentLink2URL=https://datasheet.ciiva.com/26899/getdatasheetpartid-559226-26899379.pdf?src-supplier=Verical, ComponentLink3Description=https://datasheet.ciiva.com/6785/m20-782-6785605.pdf?src-supplier=Digikey, ComponentLink3URL=https://datasheet.ciiva.com/6785/m20-782-6785605.pdf?src-supplier=Digikey, ComponentLink4Description=https://datasheet.ciiva.com/10151/m20-782-10151366.pdf?src-supplier=Avnet, ComponentLink4URL=https://datasheet.ciiva.com/10151/m20-782-10151366.pdf?src-supplier=Avnet, Manufacturer Part Number=M20-7821046, Pricing="1=1.46, 22=1.27, 110=1.13473, 506=0.94561, 1012=0.81052, 5016=0.71867, 10010=0.70245 (USD)", RoHS=Yes, Stock=2356, Supplier=Digikey
J5 J6: library part 67997-106HLF, "Conn Unshrouded Header HDR 6 POS 2.54mm Solder ST Top Entry Thru-Hole BergStik® Bulk", Manufacturer="Amphenol ICC / FCI", Supplier Part Number=609-3393-ND, Category="Headers and Wire Housings", ComponentLink1Description=http://uk.rs-online.com/webdocs/1450/0900766b81450b8b.pdf?src-supplier=Rs, ComponentLink1URL=http://uk.rs-online.com/webdocs/1450/0900766b81450b8b.pdf?src-supplier=Rs, ComponentLink2Description=https://datasheet.octopart.com/67997-106HLF-Areva-datasheet-118652.pdf?src-supplier=Digikey, ComponentLink2URL=https://datasheet.octopart.com/67997-106HLF-Areva-datasheet-118652.pdf?src-supplier=Digikey, ComponentLink3Description=https://datasheet.octopart.com/67997-106HLF-Amphenol-Communications-Solutions-datasheet-36854132.pdf?src-supplier=Farnell, ComponentLink3URL=https://datasheet.octopart.com/67997-106HLF-Amphenol-Communications-Solutions-datasheet-36854132.pdf?src-supplier=Farnell, ComponentLink4Description=https://cdn.amphenol-icc.com/media/wysiwyg/files/drawing/67996.pdf?src-supplier=Mouser, ComponentLink4URL=https://cdn.amphenol-icc.com/media/wysiwyg/files/drawing/67996.pdf?src-supplier=Mouser, ComponentLink5Description=https://cdn.amphenol-icc.com/media/wysiwyg/files/drawing/67996.pdf?src-supplier=Avnet, ComponentLink5URL=https://cdn.amphenol-icc.com/media/wysiwyg/files/drawing/67996.pdf?src-supplier=Avnet, ComponentLink6Description=http://components.arrow.com/part/dataview/41913658S7633350N8314?src-supplier=Arrow+Electronics, ComponentLink6URL=http://components.arrow.com/part/dataview/41913658S7633350N8314?src-supplier=Arrow+Electronics, ComponentLink7Description=https://cdn.amphenol-icc.com/media/wysiwyg/files/drawing/67996.pdf?src-supplier=Onlinecomponents.com, ComponentLink7URL=https://cdn.amphenol-icc.com/media/wysiwyg/files/drawing/67996.pdf?src-supplier=Onlinecomponents.com, ComponentLink8Description=http://www.farnell.com/datasheets/1876884.pdf?src-supplier=Newark, ComponentLink8URL=http://www.farnell.com/datasheets/1876884.pdf?src-supplier=Newark, ComponentLink9Description=https://cdn.amphenol-icc.com/media/wysiwyg/files/drawing/67996.pdf?src-supplier=Allied+Electronics, ComponentLink9URL=https://cdn.amphenol-icc.com/media/wysiwyg/files/drawing/67996.pdf?src-supplier=Allied+Electronics, ComponentLink10Description=https://cdn.amphenol-icc.com/media/wysiwyg/files/drawing/67996.pdf?src-supplier=TTI, ComponentLink10URL=https://cdn.amphenol-icc.com/media/wysiwyg/files/drawing/67996.pdf?src-supplier=TTI, ComponentLink11Description=https://cdn.amphenol-icc.com/media/wysiwyg/files/drawing/67996.pdf?src-supplier=Heilind+Electronics, ComponentLink11URL=https://cdn.amphenol-icc.com/media/wysiwyg/files/drawing/67996.pdf?src-supplier=Heilind+Electronics, Manufacturer Part Number=67997-106HLF, Pricing="1=0.54, 10=0.462, 400=0.3562, 800=0.33919, 1200=0.32961, 5200=0.29721, 10000=0.28381 (USD)", RoHS=No, Stock=4784, Supplier=Digikey
J7: "FCI Right Angle Surface Mount Mount Female USB Connector; 100 V ac; 1.8A", Color=Black, Current Rating=1.8A, Flammability Rating="UL94 V-0", Insulation Resistance=1GR, Manufacturer="Amphenol ICC / FCI", Max Operating Temperature=85°C, Max Voltage Rating (AC)=100V, Min Operating Temperature=-55°C, Package Quantity=1200, Supplier Part Number=609-4616-1-ND, Category=LDO, ComponentLink1Description=https://cdn.amphenol-icc.com/media/wysiwyg/files/documentation/datasheet/inputoutput/io_usb_micro.pdf?src-supplier=Arrow+Electronics, ComponentLink1URL=https://cdn.amphenol-icc.com/media/wysiwyg/files/documentation/datasheet/inputoutput/io_usb_micro.pdf?src-supplier=Arrow+Electronics, ComponentLink2Description=https://cdn.amphenol-icc.com/media/wysiwyg/files/documentation/datasheet/inputoutput/io_usb_micro.pdf?src-supplier=Onlinecomponents.com, ComponentLink2URL=https://cdn.amphenol-icc.com/media/wysiwyg/files/documentation/datasheet/inputoutput/io_usb_micro.pdf?src-supplier=Onlinecomponents.com, ComponentLink3Description=https://cdn.amphenol-icc.com/media/wysiwyg/files/documentation/datasheet/inputoutput/io_usb_micro.pdf?src-supplier=Verical, ComponentLink3URL=https://cdn.amphenol-icc.com/media/wysiwyg/files/documentation/datasheet/inputoutput/io_usb_micro.pdf?src-supplier=Verical, ComponentLink4Description=https://datasheet.octopart.com/10118193-0001LF-Amphenol-Communications-Solutions-datasheet-96019471.pdf?src-supplier=Element14, ComponentLink4URL=https://datasheet.octopart.com/10118193-0001LF-Amphenol-Communications-Solutions-datasheet-96019471.pdf?src-supplier=Element14, ComponentLink5Description=https://cdn.amphenol-icc.com/media/wysiwyg/files/documentation/datasheet/inputoutput/io_usb_micro.pdf?src-supplier=Avnet, ComponentLink5URL=https://cdn.amphenol-icc.com/media/wysiwyg/files/documentation/datasheet/inputoutput/io_usb_micro.pdf?src-supplier=Avnet, ComponentLink6Description=https://cdn.amphenol-icc.com/media/wysiwyg/files/documentation/datasheet/inputoutput/io_usb_micro.pdf?src-supplier=TTI, ComponentLink6URL=https://cdn.amphenol-icc.com/media/wysiwyg/files/documentation/datasheet/inputoutput/io_usb_micro.pdf?src-supplier=TTI, ComponentLink7Description=https://datasheet.octopart.com/10118193-0001LF-Amphenol-Communications-Solutions-datasheet-11792339.pdf?src-supplier=Electro+Sonic, ComponentLink7URL=https://datasheet.octopart.com/10118193-0001LF-Amphenol-Communications-Solutions-datasheet-11792339.pdf?src-supplier=Electro+Sonic, ComponentLink8Description=https://datasheet.octopart.com/10118193-0001LF-Amphenol-Communications-Solutions-datasheet-55953155.pdf?src-supplier=TME, ComponentLink8URL=https://datasheet.octopart.com/10118193-0001LF-Amphenol-Communications-Solutions-datasheet-55953155.pdf?src-supplier=TME, Connector Type=USB,Receptacle, Contact Material="Copper Alloy", Contact Plating=Gold, Depth=5.67mm, Features=Shielded, Gender=Female, Housing Material=Polymer, Length=7.86mm, Manufacturer Part Number=10118193-0001LF, Mounting Technology="Surface Mount,Horizontal", Number of Contacts=5, Number of Ports=1, Orientation="Right Angle", Packaging="Tape and Reel", Pins=5, Pitch=0.65mm, Pricing="1=0.41, 10=0.351, 25=0.3288, 50=0.313, 100=0.2979, 250=0.27924, 500=0.2659 (USD)", Radiation Hardening=No, RoHS=No, Series=-, Stock=130789, Supplier=Digikey, Termination=Solder, Voltage Rating=100V
J8 J9: library part PAD_WITH_HOLE_4mmx1.5mm, "Pad with a hole 4mmx1.5mm"
JP1 JP4: library part 68000-103HLF, "Conn Unshrouded Header HDR 3 POS 2.54mm Solder ST Top Entry Thru-Hole BergStik® Automotive Bulk", Manufacturer="Amphenol ICC / FCI", Supplier Part Number=609-3461-ND, Category="Headers and Wire Housings", ComponentLink1Description=https://datasheet.ciiva.com/46392/1914865-46392021.pdf?src-supplier=Element14, ComponentLink1URL=https://datasheet.ciiva.com/46392/1914865-46392021.pdf?src-supplier=Element14, Manufacturer Part Number=68000-103HLF, Pricing="1=0.3, 10=0.251, 100=0.2132, 500=0.19026, 1000=0.18116, 5000=0.1617, 10000=0.15399 (USD)", RoHS=No, Stock=13111, Supplier=Digikey
JP2: library part 68602-204HLF, "Conn Unshrouded Header HDR 4 POS 2.54mm Solder ST Top Entry Thru-Hole BergStik® Bulk", Manufacturer="AMPHENOL ICC (FCI)", Supplier Part Number=609-3369-ND, Manufacturer Part Number=68602-204HLF, RoHS=No, Supplier=Digikey
JP3: library part 68001-204HLF, "Conn Unshrouded Header HDR 4 POS 2.54mm Solder ST Thru-Hole Bag", Color=Black, Current Rating=3A, Flammability Rating="UL94 V-0", Insulation Resistance=5GR, Manufacturer="Amphenol ICC / FCI", Max Operating Temperature=125°C, Min Operating Temperature=-65°C, Package Quantity=100, Supplier Part Number=609-3402-ND, Voltage Rating=1.5kV, Category="Headers and Wire Housings", ComponentLink1Description=http://uk.rs-online.com/webdocs/1450/0900766b81450c68.pdf?src-supplier=Rs, ComponentLink1URL=http://uk.rs-online.com/webdocs/1450/0900766b81450c68.pdf?src-supplier=Rs, ComponentLink2Description=http://components.arrow.com/part/dataview/42735081S8853857N8314?src-supplier=Arrow+Electronics, ComponentLink2URL=http://components.arrow.com/part/dataview/42735081S8853857N8314?src-supplier=Arrow+Electronics, ComponentLink3Description=https://cdn.amphenol-icc.com/media/wysiwyg/files/drawing/68000.pdf?src-supplier=Avnet, ComponentLink3URL=https://cdn.amphenol-icc.com/media/wysiwyg/files/drawing/68000.pdf?src-supplier=Avnet, ComponentLink4Description=https://cdn.amphenol-icc.com/media/wysiwyg/files/drawing/68000.pdf?src-supplier=Allied+Electronics, ComponentLink4URL=https://cdn.amphenol-icc.com/media/wysiwyg/files/drawing/68000.pdf?src-supplier=Allied+Electronics, ComponentLink5Description=https://datasheet.octopart.com/68001-204HLF-Amphenol-Communications-Solutions-datasheet-100449246.pdf?src-supplier=Future+Electronics, ComponentLink5URL=https://datasheet.octopart.com/68001-204HLF-Amphenol-Communications-Solutions-datasheet-100449246.pdf?src-supplier=Future+Electronics, ComponentLink6Description=https://cdn.amphenol-icc.com/media/wysiwyg/files/drawing/68000.pdf?src-supplier=Digikey, ComponentLink6URL=https://cdn.amphenol-icc.com/media/wysiwyg/files/drawing/68000.pdf?src-supplier=Digikey, ComponentLink7Description=https://datasheet.octopart.com/68001-204HLF-Amphenol-Communications-Solutions-datasheet-41232361.pdf?src-supplier=Element14, ComponentLink7URL=https://datasheet.octopart.com/68001-204HLF-Amphenol-Communications-Solutions-datasheet-41232361.pdf?src-supplier=Element14, ComponentLink8Description=https://cdn.amphenol-icc.com/media/wysiwyg/files/drawing/68000.pdf?src-supplier=Mouser, ComponentLink8URL=https://cdn.amphenol-icc.com/media/wysiwyg/files/drawing/68000.pdf?src-supplier=Mouser, ComponentLink9Description=https://cdn.amphenol-icc.com/media/wysiwyg/files/drawing/68000.pdf?src-supplier=TTI, ComponentLink9URL=https://cdn.amphenol-icc.com/media/wysiwyg/files/drawing/68000.pdf?src-supplier=TTI, ComponentLink10Description=https://cdn.amphenol-icc.com/media/wysiwyg/files/drawing/68000.pdf?src-supplier=Heilind+Electronics, ComponentLink10URL=https://cdn.amphenol-icc.com/media/wysiwyg/files/drawing/68000.pdf?src-supplier=Heilind+Electronics, ComponentLink11Description=https://datasheet.octopart.com/68001-204HLF-Amphenol-Communications-Solutions-datasheet-154727322.pdf?src-supplier=Master+Electronics, ComponentLink11URL=https://datasheet.octopart.com/68001-204HLF-Amphenol-Communications-Solutions-datasheet-154727322.pdf?src-supplier=Master+Electronics, Contact Gender=Male, Contact Material=Bronze, Contact Mating Length=0.23inch, Contact Plating=Gold,GXT, Contact Post Length=3.05mm, Contact Type="Male Pin", Housing Material=Thermoplastic, Manufacturer Part Number=68001-204HLF, Mounting Technology="Through Hole", Number of Contacts=4, Number of Positions=4, Number of Rows=1, Orientation=Straight, Packaging=Bulk, Pitch=2.54mm, Pricing="1=0.47, 10=0.401, 100=0.3406, 500=0.30394, 1000=0.28942, 5000=0.25834, 10000=0.24602 (USD)", Radiation Hardening=No, RoHS=No, Series="BERGSTIK® II, MezzSelect™, Basics+", Stock=2500, Supplier=Digikey, Termination=Solder
L1: library part DFE201610P-2R2M=P2, "Inductor Power Shielded Wirewound 2.2uH 20% 1MHz Metal 1.4A 0.168Ohm DCR 0806 T/R", Case Code (Imperial)=0806, Case Code (Metric)=2016, Current Rating=2A, DC Resistance (DCR)=168mR, Inductance Tolerance=20%, Manufacturer=Murata, Manufacturer Part Number=DFE201610P-2R2M=P2, Max Operating Temperature=125°C, Min Operating Temperature=-40°C, RMS Current (Irms)=1.4A, Supplier Part Number=490-10609-1-ND, Test Frequency=1MHz, Case/Package=0806, Category="Fixed Inductors", ComponentLink1Description=http://farnell.com//datasheets/2550119.pdf?src-supplier=Farnell, ComponentLink1URL=http://farnell.com//datasheets/2550119.pdf?src-supplier=Farnell, ComponentLink2Description=https://www.murata.com/~/media/webrenewal/products/inductor/chip/tokoproducts/wirewoundmetalalloychiptype/m_dfe201610p.ashx?src-supplier=Digikey, ComponentLink2URL=https://www.murata.com/~/media/webrenewal/products/inductor/chip/tokoproducts/wirewoundmetalalloychiptype/m_dfe201610p.ashx?src-supplier=Digikey, Core Material=Ferrite, ESR=168mR, Height=1mm, Height - Seated (Max)=0.039inch, Length=0.079inch, Mounting Technology="Surface Mount", Packaging="Cut Tape", Pricing="1=0.21, 10=0.177, 100=0.1454, 1000=0.11957 (USD)", RoHS=Yes, RoHS Compliant=Yes, Saturation Current=2A, Series=DFE201610P, Shielding=Shielded, Stock=4993, Supplier=Digikey, Tolerance=20%, Width=0.063inch
MH1 MH2 MH3: "Mounting Hole 7.4mm Diameter, 3.2mm Drill"
MH4: "Hole 7.4mm Diameter (Non Copper), 3.2mm Drill NPTH"
R1: library part RC0805FR-07100KL, "125Mw Thick Film Resistors 100Ppm/ 1% 100K 0805 Chip Resistor Surface Mount Rohs", Case Code (Imperial)=0805, Case Code (Metric)=2012, Manufacturer=Yageo, Max Operating Temperature=155°C, Max Power Dissipation=125mW, Min Operating Temperature=-55°C, Package Quantity=1, Resistance Tolerance=1%, Resistor Type="Thick Film", Supplier Part Number=311-100KCRCT-ND, Temperature Coefficient=100ppm/°C, Voltage Rating=150V, Case/Package=0805, Category="Chip SMD Resistors", ComponentLink1Description=https://datasheet.ciiva.com/11808/0900766b8106beab-11808858.pdf?src-supplier=Rs, ComponentLink1URL=https://datasheet.ciiva.com/11808/0900766b8106beab-11808858.pdf?src-supplier=Rs, ComponentLink2Description=https://datasheet.ciiva.com/7941/1686128-7941677.pdf?src-supplier=Element14, ComponentLink2URL=https://datasheet.ciiva.com/7941/1686128-7941677.pdf?src-supplier=Element14, ComponentLink3Description=https://datasheet.ciiva.com/7660/38627-7660796.pdf?src-supplier=Element14, ComponentLink3URL=https://datasheet.ciiva.com/7660/38627-7660796.pdf?src-supplier=Element14, ComponentLink4Description=https://datasheet.ciiva.com/22747/444164-22747534.pdf?src-supplier=Element14, ComponentLink4URL=https://datasheet.ciiva.com/22747/444164-22747534.pdf?src-supplier=Element14, ComponentLink5Description=https://datasheet.ciiva.com/2457/pyu-r-int-thick-7-2457018.pdf?src-supplier=Digikey, ComponentLink5URL=https://datasheet.ciiva.com/2457/pyu-r-int-thick-7-2457018.pdf?src-supplier=Digikey, ComponentLink6Description=https://datasheet.ciiva.com/2457/pyu-r-int-thick-7-2457019.pdf?src-supplier=Digikey, ComponentLink6URL=https://datasheet.ciiva.com/2457/pyu-r-int-thick-7-2457019.pdf?src-supplier=Digikey, ComponentLink7Description=https://datasheet.ciiva.com/2457/pyu-r-int-thick-7-2457017.pdf?src-supplier=Digikey, ComponentLink7URL=https://datasheet.ciiva.com/2457/pyu-r-int-thick-7-2457017.pdf?src-supplier=Digikey, ComponentLink8Description=https://datasheet.ciiva.com/12667/rc0805-12667001.pdf?src-supplier=Mouser, ComponentLink8URL=https://datasheet.ciiva.com/12667/rc0805-12667001.pdf?src-supplier=Mouser, ComponentLink9Description=https://datasheet.ciiva.com/7941/1697719-7941676.pdf?src-supplier=Element14, ComponentLink9URL=https://datasheet.ciiva.com/7941/1697719-7941676.pdf?src-supplier=Element14, ComponentLink10Description=https://datasheet.ciiva.com/7941/1697719-7941678.pdf?src-supplier=Element14, ComponentLink10URL=https://datasheet.ciiva.com/7941/1697719-7941678.pdf?src-supplier=Element14, ComponentLink11Description=https://datasheet.ciiva.com/16747/rc0805-16747226.pdf?src-supplier=Future+Electronics, ComponentLink11URL=https://datasheet.ciiva.com/16747/rc0805-16747226.pdf?src-supplier=Future+Electronics, Construction=Rectangular, Depth=1.25mm, Features="Moisture Resistant", Height=0.024inch, Lead Free=5697LeadFree, Lead Pitch=0.4mm, Length=0.079inch, Manufacturer Part Number=RC0805FR-07100KL, Military Standard=Not, Number of Terminations=2, Packaging="Tape and Reel", Pins=2, Power Rating=125mW, Pricing="1=0.1, 10=0.014, 100=0.0112, 1000=0.00918, 2500=0.00686 (USD)", Reach SVHC Compliant=Unknown, RoHS=Yes, RoHS Compliant=Yes, Series=RC, Stock=398551, Supplier=Digikey, Technology="THICK FILM", Termination=SMD/SMT, Tolerance=1%, Voltage Rating (AC)=150V, Voltage Rating (DC)=150V, Width=0.049inch
R2 R3 R15 R17 R22: library part RC0805FR-07560RL, "Res General Purpose Thick Film 0805 560 Ohm 1% 1/8W ±100ppm/°C Molded Paper T/R", Manufacturer=Yageo, Supplier Part Number=311-560CRCT-ND, Category="Chip SMD Resistors", Manufacturer Part Number=RC0805FR-07560RL, Pricing="1=0.1, 10=0.012, 100=0.0112, 1000=0.00714 (USD)", RoHS=Yes, Stock=22233, Supplier=Digikey